# EAGLE board Arduino-mini-328-Sch (EAGLE 7.1.0)
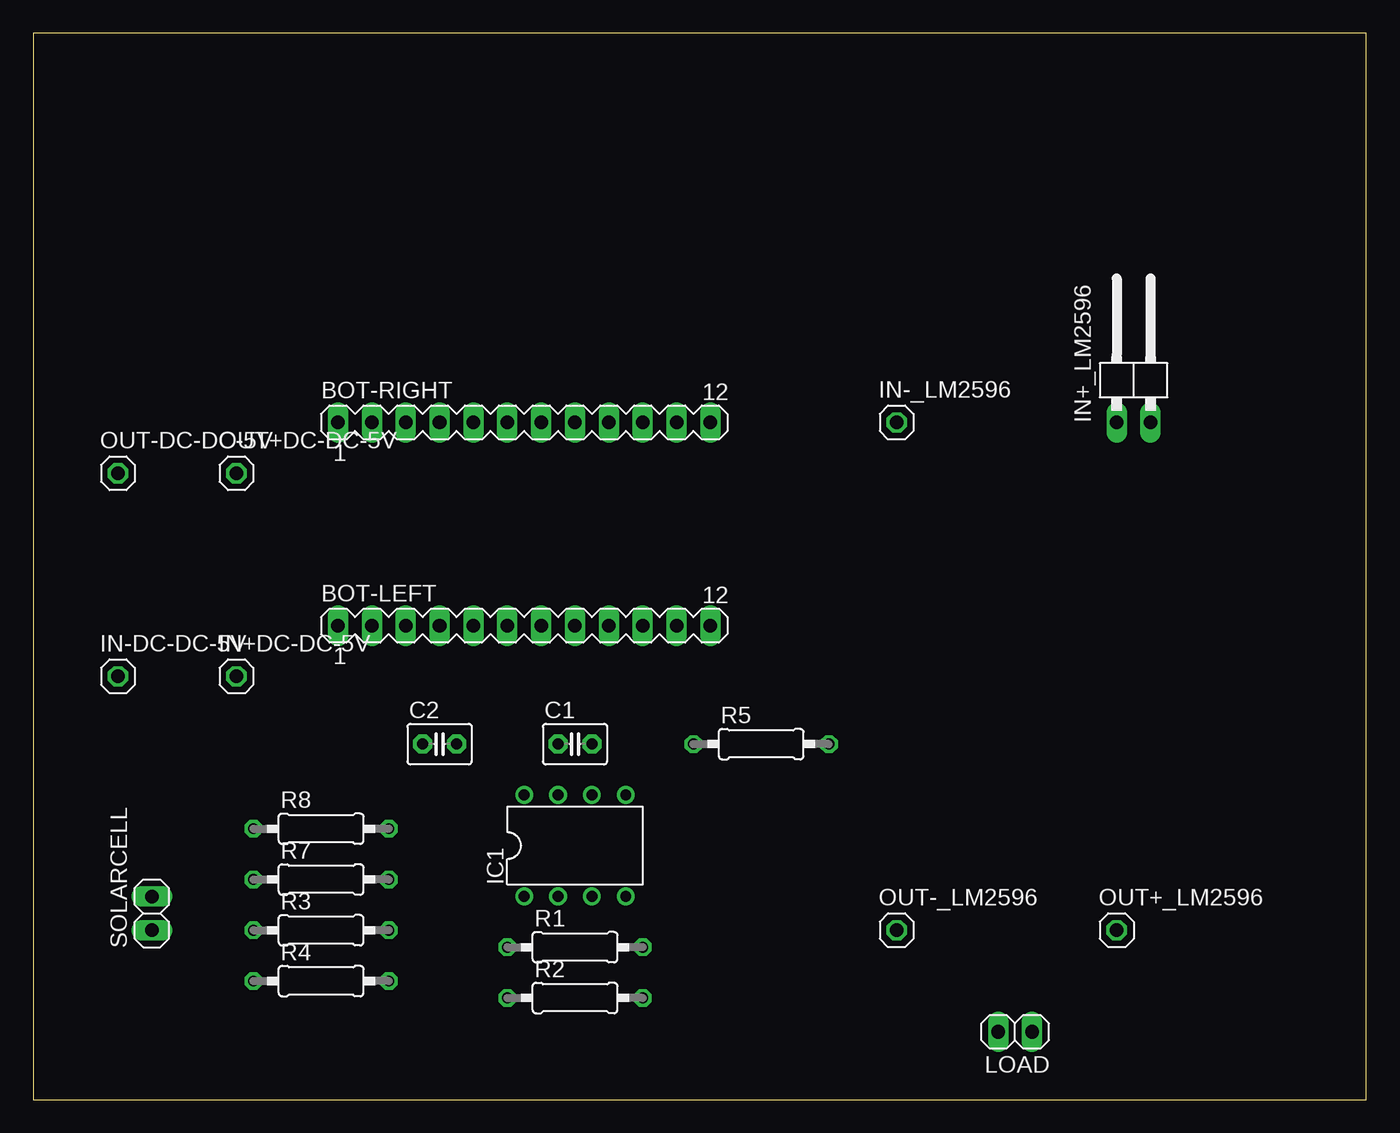
[diagram p0: board, top side]
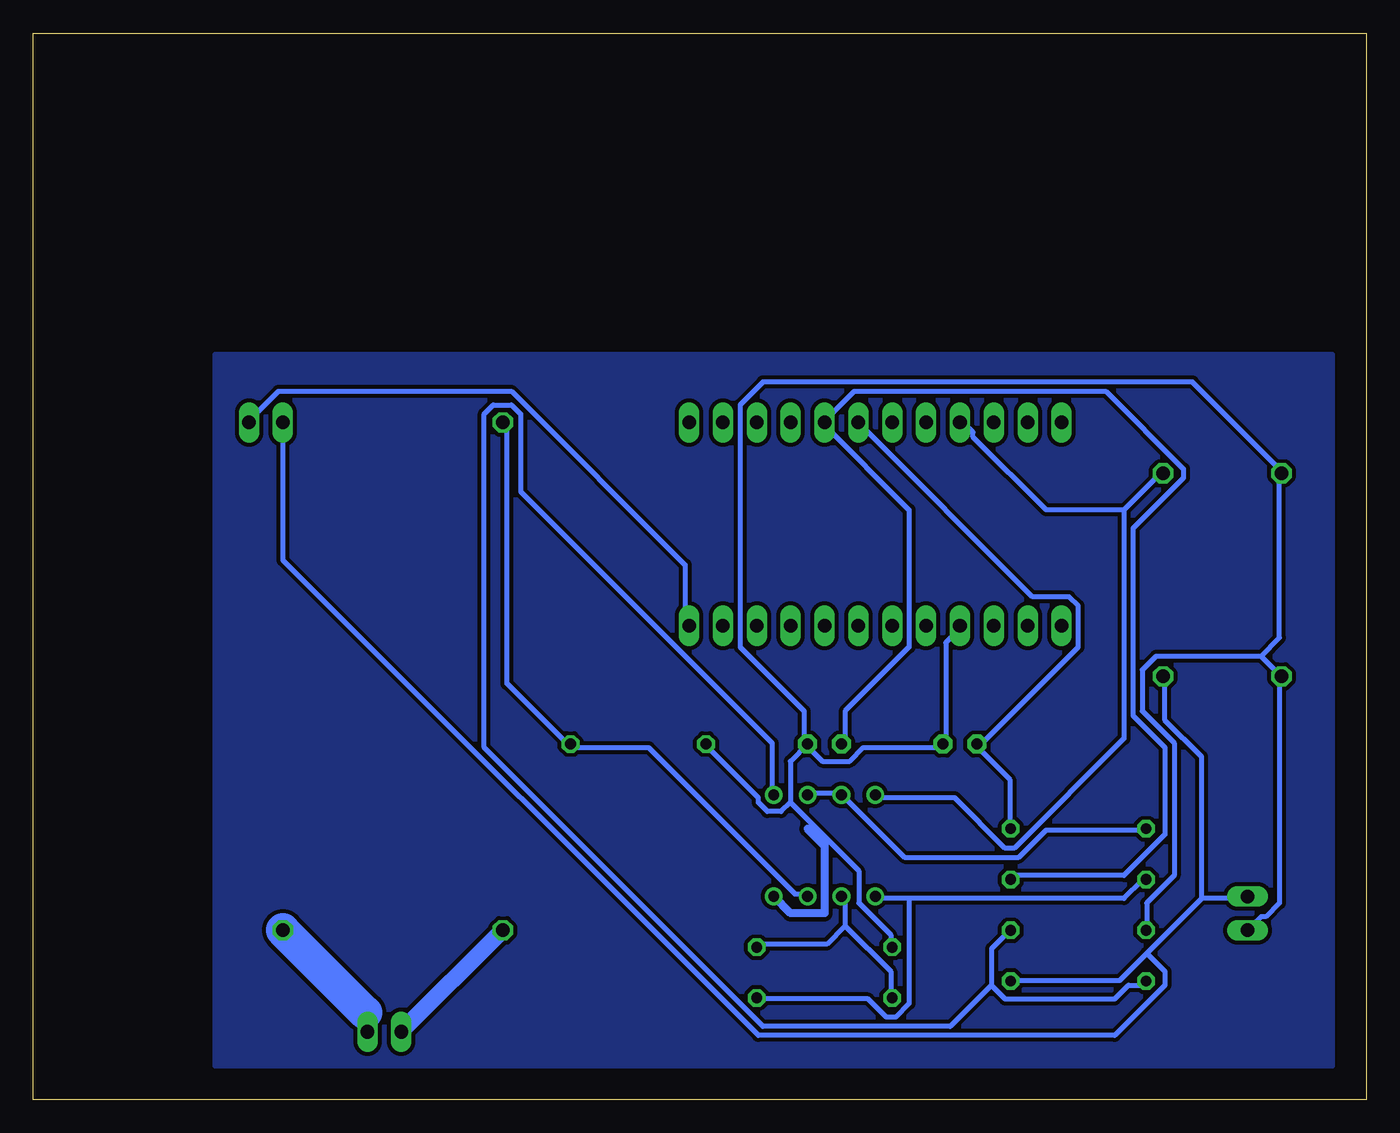
[diagram p1: board, bottom side, seen from below]

Size 100 x 80 mm. Coordinates in mm from the lower left corner, seen from the top.
Outline: 0,0 100,0 100,80 0,80 0,0
Copper layers (1*16): Top 0.035mm / dielectric 1.5mm / Bottom 0.035mm
Design rules "default *": minimum track width 15mil, minimum drill 24mil, track to track 12mil, track to pad 12mil, pad to pad 8mil, via to via 8mil, smd to smd 8mil, copper to edge 40mil, drill to drill 8mil, minimum pad ring 10mil, minimum via ring 8mil, stop-mask expansion 4mil, vias tented up to drill 0mil, thermal gap 10mil

## Footprints (pad centres in the part's own frame; a part is rotated, then mirrored left to right if it is on the bottom)
MA12-1 = drill 1.016 long: 1 -13.97,0; 2 -11.43,0; 3 -8.89,0; 4 -6.35,0; 5 -3.81,0; 6 -1.27,0; 7 1.27,0; 8 3.81,0; 9 6.35,0; 10 8.89,0; 11 11.43,0; 12 13.97,0
C025-030X050 = drill 0.813 pad 1.422 octagon: 1 -1.27,0; 2 1.27,0
DIL08 = drill 0.813 pad 1.27: 1 -3.81,-3.81; 2 -1.27,-3.81; 3 1.27,-3.81; 4 3.81,-3.81; 5 3.81,3.81; 6 1.27,3.81; 7 -1.27,3.81; 8 -3.81,3.81
1X02/90 = drill 1.016 long: 1 -1.27,-3.81; 2 1.27,-3.81
1X01 = drill 1.016 octagon: 1 0,0
1X02 = drill 1.016 long: 1 -1.27,0; 2 1.27,0
0207/10 = drill 0.813 octagon: 1 -5.08,0; 2 5.08,0

## Placement (x,y rotation side)
BOT-LEFT  [MA12-1]  36.83,35.56 0 top
BOT-RIGHT  [MA12-1]  36.83,50.8 0 top
C1  0.1uF  [C025-030X050]  40.64,26.67 0 top
C2  0.1uF  [C025-030X050]  30.48,26.67 0 top
IC1  LM358N  [DIL08]  40.64,19.05 0 top
IN+_LM2596  [1X02/90]  82.55,54.61 0 top
IN+DC-DC-5V  [1X01]  15.24,31.75 0 top
IN-_LM2596  [1X01]  64.77,50.8 0 top
IN-DC-DC-5V  [1X01]  6.35,31.75 0 top
LOAD  [1X02]  73.66,5.08 180 top
OUT+_LM2596  [1X01]  81.28,12.7 0 top
OUT+DC-DC-5V  [1X01]  15.24,46.99 0 top
OUT-_LM2596  [1X01]  64.77,12.7 0 top
OUT-DC-DC-5V  [1X01]  6.35,46.99 0 top
R1  1k  [0207/10]  40.64,11.43 0 top
R2  9k  [0207/10]  40.64,7.62 0 top
R3  237k  [0207/10]  21.59,12.7 0 top
R4  1M  [0207/10]  21.59,8.89 0 top
R5  0.1  [0207/10]  54.61,26.67 0 top
R7  50  [0207/10]  21.59,16.51 0 top
R8  50  [0207/10]  21.59,20.32 0 top
SOLARCELL  [1X02]  8.89,13.97 90 top

## Library data of the parts
BOT-LEFT BOT-RIGHT = con-lstb; OC_FARNELL: unknown; OC_NEWARK: unknown
C1 C2 = adafruit
IC1 = linear
IN+_LM2596 IN+DC-DC-5V IN-_LM2596 IN-DC-DC-5V LOAD OUT+_LM2596 OUT+DC-DC-5V OUT-_LM2596 OUT-DC-DC-5V SOLARCELL = pinhead
R1-R5 R7 R8 = resistor

## Nets
GNDA: BOT-LEFT.4 C1.2 C2.2 IN-DC-DC-5V.1 OUT-DC-DC-5V.1 R1.1 R3.1 R5.1 SOLARCELL.1
N$1: IC1.1 R2.2 R7.1
N$2: IC1.2 R1.2 R2.1
N$3: BOT-LEFT.12 IN+_LM2596.2
N$4: IC1.4
N$5: IC1.6 IC1.7 R8.1
N$6: IC1.3 IN-_LM2596.1 R5.2
N$7: BOT-RIGHT.8 C1.1 R7.2
N$8: BOT-RIGHT.7 C2.1 R8.2
N$10: IN+_LM2596.1 IN+DC-DC-5V.1 R4.2 SOLARCELL.2
N$11: IC1.5 R3.2 R4.1
N$12: LOAD.2 OUT-_LM2596.1
N$13: OUT+_LM2596.1
S$1: LOAD.1
V+: BOT-RIGHT.4 IC1.8 OUT+DC-DC-5V.1

## Tracks (layer width: path | path; a pad name or v marks a point on that pad's centre or on a via)
GNDA
  Bottom 0.381: BOT-LEFT.4 30.52,35.32 31.55,34.29 31.55,26.75 C2.2 31.89,26.4 37.72,26.4 38.75,25.38 40.8,25.38 41.83,26.4 C1.2 | 43.2,22.29 38.06,17.14 38.06,14.74 35.66,12.34 35.66,11.66 R1.1 | 43.2,22.29 43.2,25.38 C1.2 | 43.2,22.29 43.89,21.6 44.92,21.6 45.61,22.29 45.61,22.63 49.38,26.4 R5.1 | 7.89,33.26 15.77,33.26 16.8,32.23 16.8,29.15 14.4,26.75 14.4,16.8 16.46,14.74 16.46,13.03 R3.1 | 7.89,33.26 6.51,31.89 IN-DC-DC-5V.1 6.51,31.55 6.51,14.74 7.54,13.72 7.89,13.72 8.57,13.03 SOLARCELL.1 | 7.89,33.26 6.51,34.63 6.51,46.98 OUT-DC-DC-5V.1 6.51,47.32 13.03,53.84 45.26,53.84 46.98,52.12 46.98,33.95 42.18,29.15 42.18,26.75 C1.2
N$1
  Bottom 0.381: 34.29,15.09 18.17,15.09 16.8,16.46 R7.1 | 34.29,15.09 36.69,15.09 IC1.1 | 34.29,15.09 34.29,7.2 35.32,6.17 36.01,6.17 37.38,7.54 45.61,7.54 R2.2
N$2
  Bottom 0.381: 39.09,13.03 35.66,9.6 35.66,7.89 R2.1 | 39.09,13.03 39.09,15.09 IC1.2 | 39.09,13.03 40.46,11.66 45.61,11.66 R1.2
N$3
  Bottom 0.381: BOT-LEFT.12 51.09,35.66 51.09,40.12 64.12,53.15 81.61,53.15 83.67,51.09 IN+_LM2596.2
N$4
  Bottom 0.61: IC1.4 43.18,13.97 40.64,13.97 40.64,19.05 41.91,20.32
N$5
  Bottom 0.381: R8.1 16.8,20.23 24,20.23 26.06,18.17 34.63,18.17 39.09,22.63 IC1.7 39.43,22.97 41.83,22.97 IC1.6
N$6
  Bottom 0.381: IC1.3 42.18,15.43 42.86,15.43 53.84,26.4 59.66,26.4 R5.2 60.01,26.75 64.47,31.2 64.47,50.75 IN-_LM2596.1
N$7
  Bottom 0.381: R7.2 26.4,16.8 18.17,16.8 15.09,19.89 15.09,26.4 17.49,28.8 17.49,42.86 13.72,46.63 13.72,47.32 19.55,53.15 38.41,53.15 40.46,51.09 BOT-RIGHT.8 40.8,50.75 34.29,44.23 34.29,33.95 39.09,29.15 39.09,26.75 C1.1
N$8
  Bottom 0.381: 29.15,26.4 26.75,24 26.75,20.57 R8.2 | 29.15,26.4 21.6,33.95 21.6,37.03 22.29,37.72 25.03,37.72 38.06,50.75 BOT-RIGHT.7 | 29.15,26.4 C2.1
N$10
  Bottom 0.381: 12.34,15.09 16.46,10.97 | 16.46,10.97 18.52,8.91 26.4,8.91 R4.2 | 12.34,15.09 8.91,15.09 SOLARCELL.2 | 12.34,15.09 12.34,25.72 15.09,28.46 15.09,31.55 IN+DC-DC-5V.1 | 16.46,10.97 15.09,9.6 15.09,8.57 18.86,4.8 45.61,4.8 81.27,40.46 81.27,50.75 IN+_LM2596.1
N$11
  Bottom 0.381: 28.12,8.57 27.09,7.54 18.86,7.54 17.83,8.57 16.8,8.57 R4.1 | 28.12,8.57 28.12,11.32 26.75,12.69 R3.2 | 28.12,8.57 31.2,5.49 45.26,5.49 66.18,26.4 66.18,51.44 65.49,52.12 64.12,52.12 63.44,51.44 63.44,45.61 44.58,26.75 44.58,22.97 IC1.5
N$12
  Bottom 0.381: 64.81,12.69 OUT-_LM2596.1 | 72.35,5.14 LOAD.2
  Bottom 1.27: 72.35,5.14 64.81,12.69
N$13
  Bottom 2.54: OUT+_LM2596.1 75.09,6.51
S$1
  Bottom 0.381: 75.09,5.14 LOAD.1
S$2
  pour Bottom: 2.54,2.54 86.36,2.54 86.36,55.88 2.54,55.88
V+
  Bottom 0.381: 18.17,44.23 18.17,27.09 26.4,18.86 27.09,18.86 30.86,22.63 36.69,22.63 IC1.8 | 18.17,44.23 15.43,46.98 OUT+DC-DC-5V.1 | 18.17,44.23 24,44.23 29.49,49.72 29.49,50.06 30.18,50.75 BOT-RIGHT.4